# Altium PCB PCB.PcbDoc
Units mm, origin at the board's own origin, x right, y up, seen from the top; angles counter-clockwise.
Board outline 46.5 x 30 mm, 2 copper layers (Top Layer, Bottom Layer), stack 1.57 mm thick; 12 components, 5 nets, 25 pads, 36 vias.
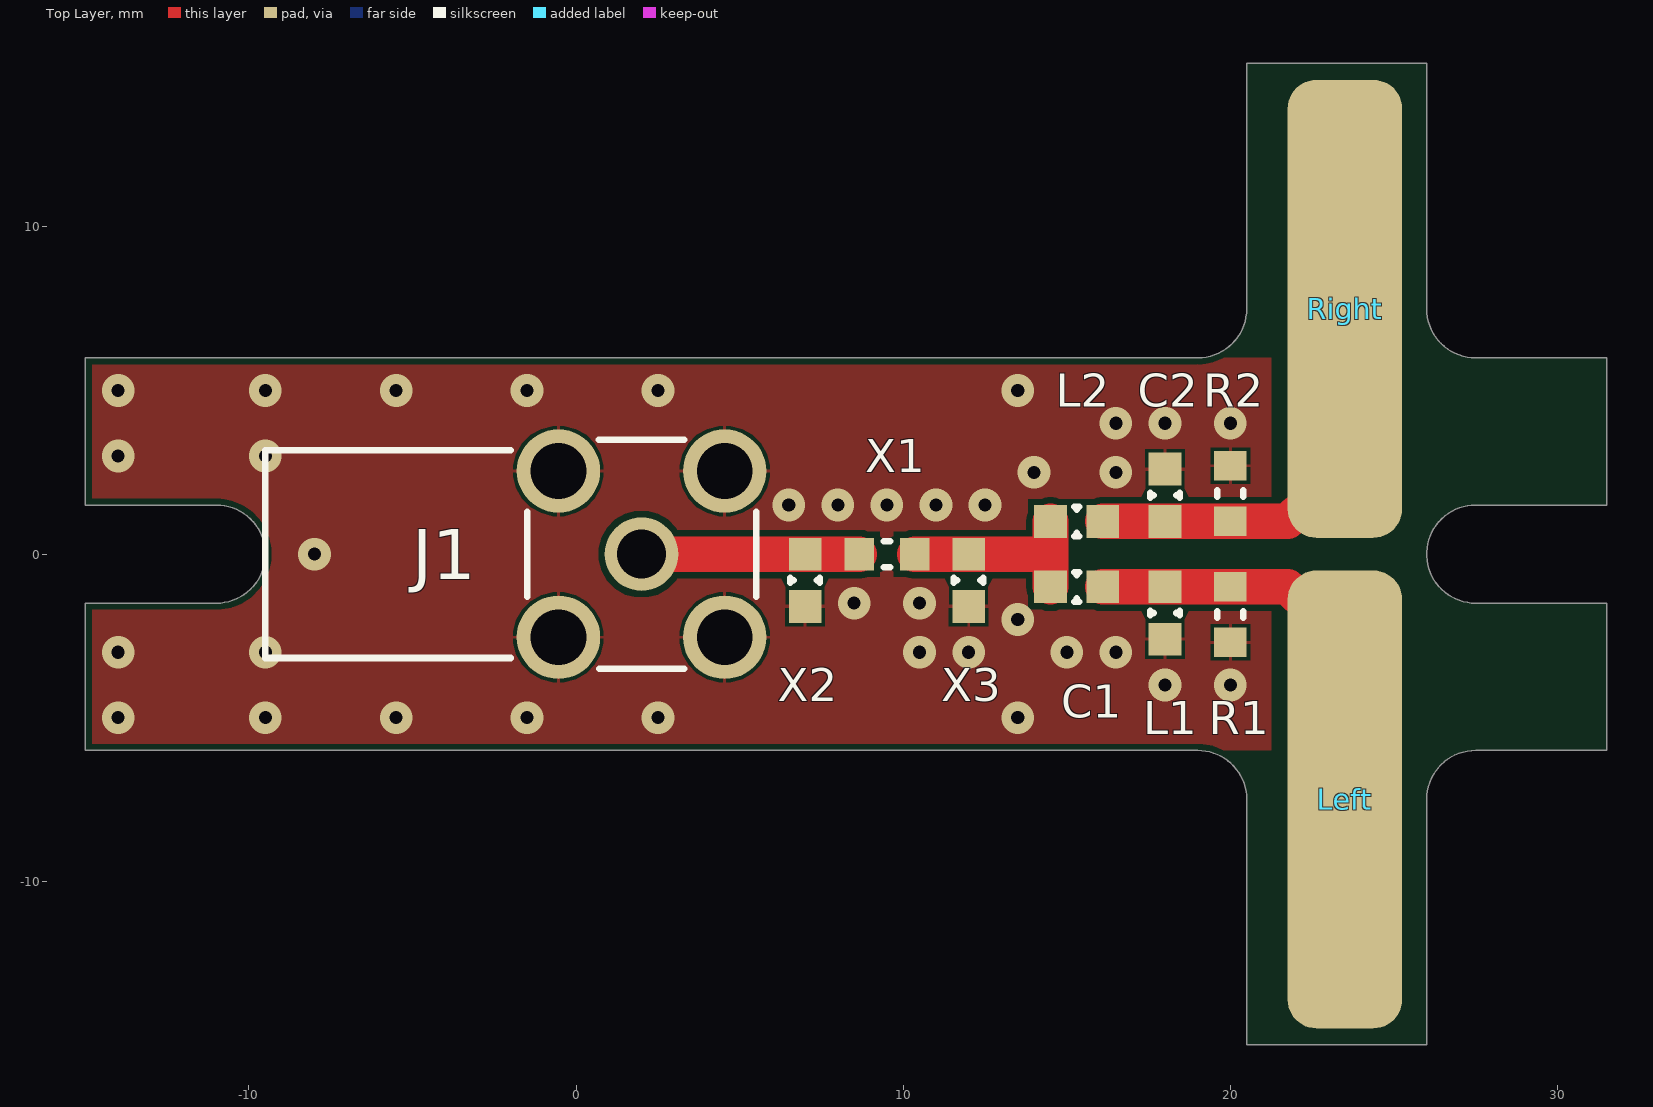
[diagram p0: Top Layer view]
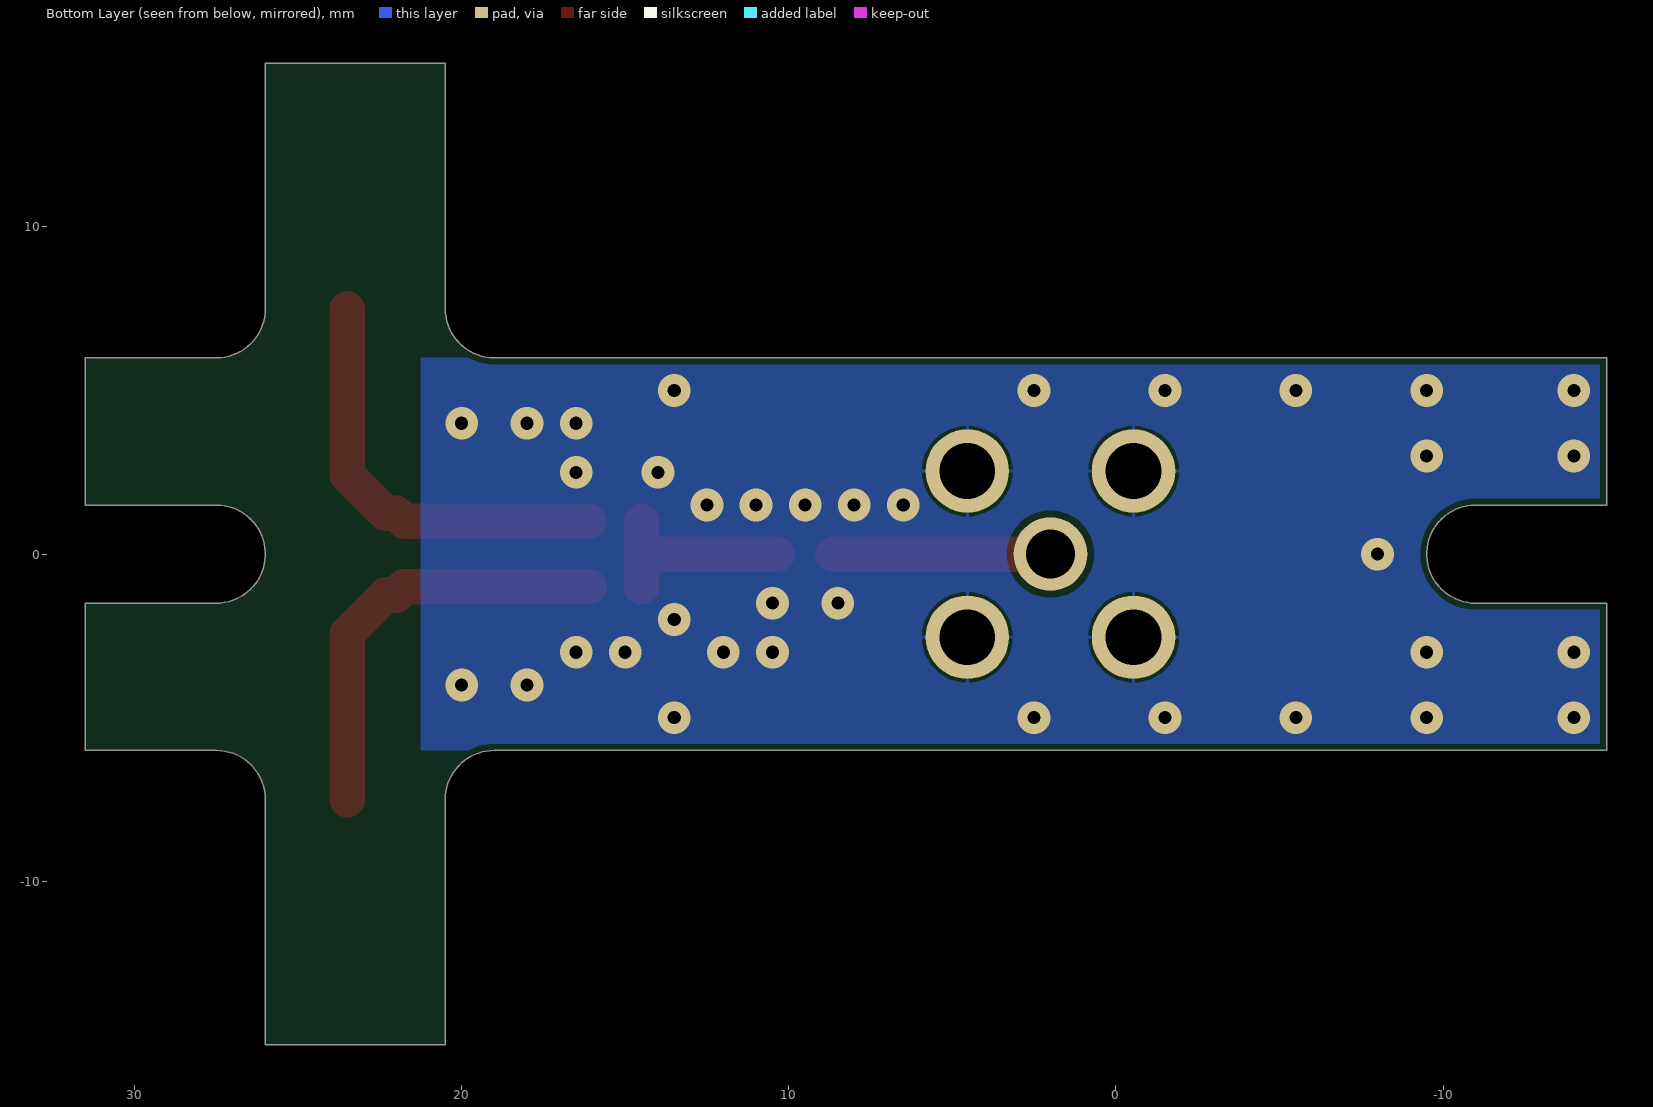
[diagram p1: Bottom Layer view, seen from below]
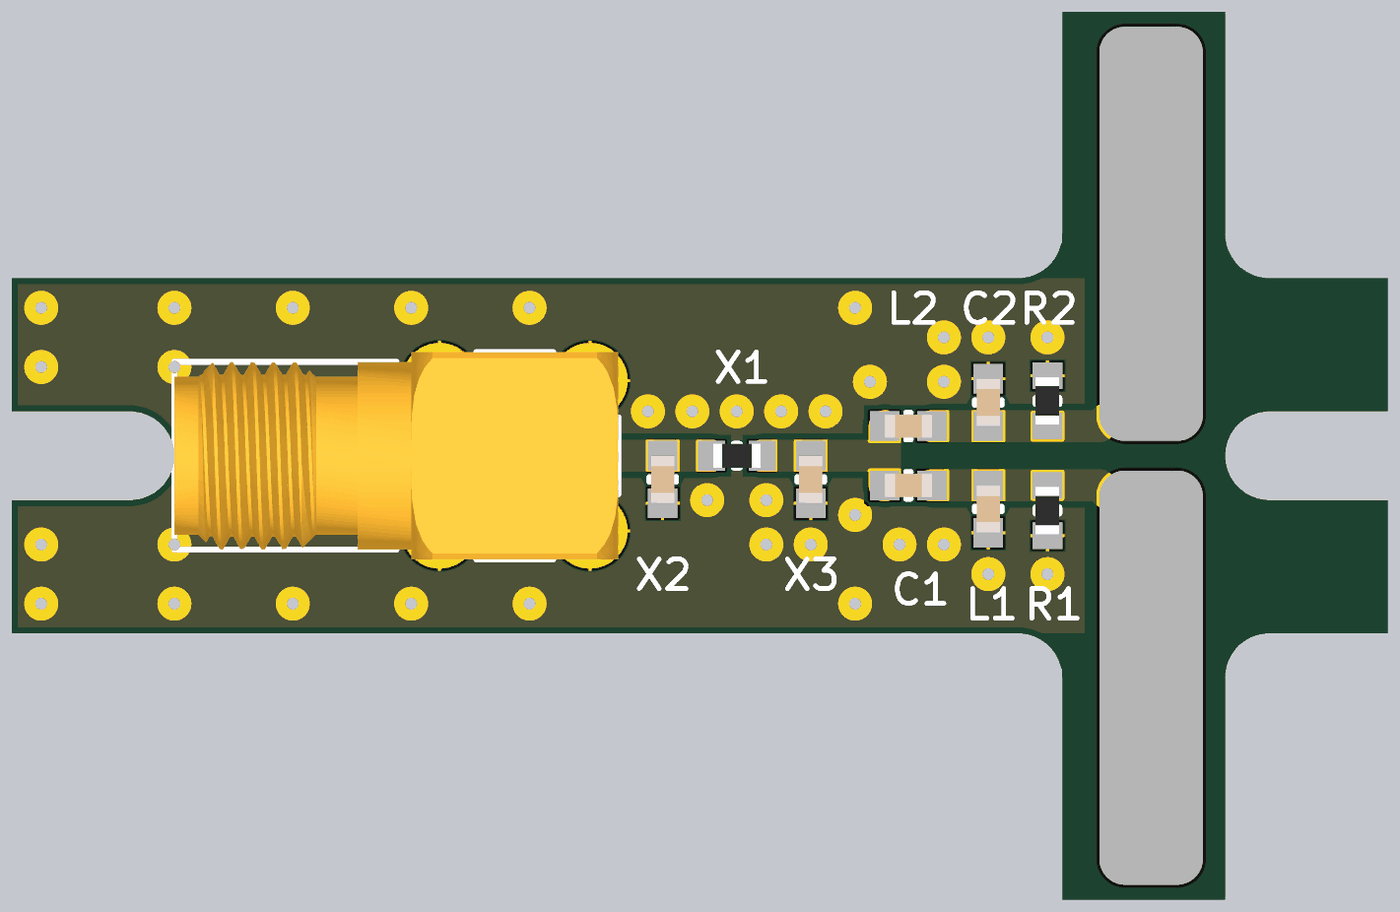
[diagram p2: 3D render of the assembled board from above, using the file's embedded part models]

## Layer stack, top to bottom
Top Solder: solder mask 0.0102, Solder Resist, Dk 3.5
Top Layer: signal copper 0.0356
Dielectric 1: core 1.4986, Core-043, Dk 4.3
Bottom Layer: signal copper 0.0356
Bottom Solder: solder mask 0.0102, Solder Resist, Dk 3.5

## Board outline
-15,-6 19,-6 cw(c19,-7.5) 20.5,-7.5 20.5,-15 26,-15 26,-7.5 cw(c27.5,-7.5) 27.5,-6 31.5,-6 31.5,-1.5 27.5,-1.5 cw(c27.5,0) 27.5,1.5 31.5,1.5 31.5,6 27.5,6 cw(c27.5,7.5) 26,7.5 26,15 20.5,15 20.5,7.5 cw(c19,7.5) 19,6 -15,6 -15,1.5 -11.5,1.5 -11,1.5 cw(c-11,0) -11,-1.5 -15,-1.5

## Design rules (kind name [scope] priority, off if disabled: settings)
BoardOutlineClearance [All] p1: gap=0.2 ignorepadtopadclearanceinfootprint=FALSE
Clearance "Schematic Clearance Constraint_2" [InNet('CPW_T')] p1: gap=0.2 ignorepadtopadclearanceinfootprint=FALSE
Clearance "Schematic Clearance Constraint_5" [InNet('CPW_IN')] p2: gap=0.2 ignorepadtopadclearanceinfootprint=FALSE
Clearance "Schematic Clearance Constraint_4" [InNet('CPW_OUT')] p3: gap=0.2 ignorepadtopadclearanceinfootprint=FALSE
Clearance "Schematic Clearance Constraint" [InNet('NetC8_2')] p4: gap=0.2 ignorepadtopadclearanceinfootprint=FALSE
Clearance [All] p5: gap=0.2 ignorepadtopadclearanceinfootprint=FALSE except(0.25: Arc-Hole Track-Hole SMDPad-Hole THPad-Hole Via-Hole Fill-Hole Poly-Hole Region-Hole Text-Hole)
ComponentClearance [All] p1: gap=0.102 collisioncheckmode=3 verticalgap=0.102 showdistances=TRUE
DiffPairsRouting [All] p1: maxlimit=0.102 minlimit=0.102 mostfreqgap=0.102 toplayer_minwidth=0.102 toplayer_maxwidth=1816.048 toplayer_prefwidth=0.102 bottomlayer_minwidth=0.102 bottomlayer_maxwidth=1816.048 bottomlayer_prefwidth=0.102 maxuncoupledlength=12.7
Height [All] p1: minheight=0 maxheight=1816.048 prefheight=12.7
HoleSize [All] p1: absolutevalues=TRUE maxlimit=6.3 minlimit=0.2 maxpercent=80.000 minpercent=20.000
HoleToHoleClearance [All] p1: gap=0.25 allowstackedmicrovias=FALSE
MinimumAnnularRing [All] p1: minimumring=0.076
MinimumSolderMaskSliver [All] p1: minsoldermaskwidth=0
PlaneClearance [All] p1: clearance=0.102
PlaneConnect PlaneConnectPowerPads [InPadClass('PowerPads')] p1: planeconnectstyle=Direct reliefexpansion=0.508 reliefentries=4 reliefconductorwidth=0.254 reliefairgap=0.254
PlaneConnect [All] p2: pad.planeconnectstyle=Relief pad.reliefexpansion=0.3 pad.reliefentries=4 pad.reliefconductorwidth=0.102 pad.reliefairgap=0.102 via.planeconnectstyle=Direct via.reliefexpansion=0.3 via.reliefentries=4 via.reliefconductorwidth=0.127 via.reliefairgap=0.127
PolygonConnect PolygonConnectPowerPads [All vs (InPadClass('PowerPads'))] p1: connectstyle=Direct reliefconductorwidth=0.254 reliefentries=4 polygonreliefangle="90 Angle" airgapwidth=0.254
PolygonConnect [All] p2: thpad.connectstyle=Relief thpad.reliefconductorwidth=0.102 thpad.reliefentries=4 thpad.polygonreliefangle="90 Angle" thpad.airgapwidth=0.102 smdpad.connectstyle=Relief smdpad.reliefconductorwidth=0.102 smdpad.reliefentries=4 smdpad.polygonreliefangle="90 Angle" smdpad.airgapwidth=0.102 via.connectstyle=Direct via.reliefconductorwidth=0.127 via.reliefentries=4 via.polygonreliefangle="90 Angle" via.airgapwidth=0.127
RoutingVias [All] p1: holewidth=0.2 width=0.45 viastyle="Through Hole" minholewidth=0.2 minwidth=0.45 maxholewidth=6.3 maxwidth=6.55
SilkToSilkClearance [All] p1: silktosilkclearance=0
SilkToSolderMaskClearance [IsPad] p1: minsilkscreentomaskgap=0.01 clearancetoexposedcopper=TRUE
SolderMaskExpansion [All] p1: expansion=0.075 istentingtop=FALSE
SupplyNets "Schematic Supply Nets_3" [InNet('GND')] p1: voltage=0.000
SupplyNets "Schematic Supply Nets_2" [InNet('VCC')] p2: voltage=0.000
SupplyNets "Schematic Supply Nets_1" [InNet('VEE')] p3: voltage=0.000
SupplyNets "Schematic Supply Nets" [InNet('VIN')] p4: voltage=0.000
Width [All] p1: maxlimit=1816.048 minlimit=0.102 preferedwidth=0.102
20 further rules are at their usual default settings.

## Components (designator, comment, footprint, x,y, rotation, side; value= is the part's Value field where it differs from the comment)
C1 "Cap" CAPC0603N 15.3,-1 r180 top value=2.7pF
C2 "Cap" CAPC0603N 18,1.8 r270 top value=2.7pF
J1 "60311002114501" 60311002114501 2,0 r270 top
L1 "Inductor" CAPC0603N 18,-1.8 r90 top value="12 nH"
L2 "Inductor" CAPC0603N 15.3,1 r180 top value="12 nH"
Left "TAB" TAB 23.5,-7.5 r90 top
R1 "Res" RESC0603N 20,-1.85 r90 top value=49R9
R2 "Res" RESC0603N 20,1.85 r270 top value=49R9
Right "TAB" TAB 23.5,7.5 r90 top
X1 "Res" RESC0603N 9.5,0 r0 top value=0R
X2 "Cap" CAPC0603N 7,-0.8 r90 top value=TBD
X3 "Cap" CAPC0603N 12,-0.8 r90 top value=TBD

## Footprints (in the part's own frame and the unit in brackets; to place one, negate y for a bottom-side part, rotate by r counter-clockwise, add the part's x,y. Pads: shape width x height; smd on the part's side, far side on the other; paste and mask are expansions set on the pad)
60311002114501 [mm] "SMA PCB THT Jack Right Angle"
  round 2.25 hole 1.5: 1(0,0)
  round 2.55 hole 1.7: 2(-2.54,2.54) 3(2.54,2.54) 4(2.54,-2.54) 5(-2.54,-2.54)
  silkscreen extent -3.5,-11.5 3.5,3.5, body extent -3.5,-11.5 3.5,3.5, height 9.66
CAPC0603N [mm] "Chip Capacitor, Body 1.6x0.8mm, IPC Medium Density"
  rect 1x1 smd: 1(-0.8,0) 2(0.8,0)
  silkscreen extent -0.08,-0.45 0.08,0.45, body extent -0.8,-0.4 0.8,0.4, height 0.82
RESC0603N [mm] "Chip Resistor, Body 1.6x0.8mm, IPC Medium Density"
  rect 0.9x1 smd: 1(-0.85,0) 2(0.85,0)
  silkscreen extent -0.1,-0.4 0.1,0.4, body extent -0.8,-0.4 0.8,0.4, height 0.45
TAB [mm]
  rrect50% 14x3.5 smd mask+0.102: 1(0,0)

## Part data
C1 C2: library part C16149, "Multilayer Ceramic Capacitors MLCC - SMD/SMT 2.7pF 50V 0603 RoHS", Manufacturer="Samsung Electro-Mechanics", MFR=CL10C2R7CB8NNNC, PACKAGE=0603, Temperature Coefficient=C0G, Voltage - Rated=50V, #LCSC=C16149, Basic/Extended=B, pf=2.7, Price=0.009$/unit
J1: library part CMP-03913-97004421-3, "Rf Coax Conn, Sma R/A Jack, 50 Ohm, Pcb Rohs Compliant: Yes", Insulation Resistance=5GΩ, Max Operating Temperature=165°C, Min Operating Temperature=-65°C, Connector Type=SMA, Impedance=50Ω, Insertion Loss (dB)=0.14dB, Insulation Material=PTFE, Orientation="Right Angle"
L1 L2: library part 744786112, MANUF=WE, DESCIPTION="INDUCTOR SMD RF 12 nH ±5% ±5% 600 mA 0603", DIGIKEY=TBD, FARNELL=TBD, MANUFCODE=744786112, NoPins=2, SCH="12 nH 0603 RF", SMD=YES, SUPPLY=SUB, TECH="Multilayer Ceramic SMT Inductor"
R1 R2: library part C23185, "Chip Resistor - Surface Mount 49.9Ohms ±1% 1/10W 0603 RoHS", MANUF="Uniroyal Elec", MANUFCODE=0603WAF499JT5E, PACKAGE='0603, #JLCPCB=C23185, B/E=B
X1: library part C21189, "Chip Resistor - Surface Mount 0Ohms ±1% 1/10W 0603 RoHS", MANUF="Uniroyal Elec", MANUFCODE=0603WAF0000T5E, PACKAGE='0603, #JLCPCB=C21189, B/E=B
X2 X3: library part C23969, "Multilayer Ceramic Capacitors MLCC - SMD/SMT 1pF 50V 0603 RoHS", Manufacturer="Samsung Electro-Mechanics", MFR=CL10C010CB8NNNC, PACKAGE=0603, Temperature Coefficient=C0G, Voltage - Rated=50V, #LCSC=C23969, Basic/Extended=B, pf=1, Price=0.007$/unit

## Via types
v1: diameter 1, hole 0.4, Top Layer to Bottom Layer, 36 vias

## Nets (pads, with @x,y where several pads share a name; then routed paths per layer and width w, separated by ;. In a path a pad name is that pad's centre, name@x,y a point inside that pad or via, vN(x,y) a via of type N, cw(c..) or ccw(c..) an arc to the next point about the centre after c; other vN are vias at no path point)
GND: C2.1 J1.2 J1.3 J1.4 J1.5 L1.1 R1.1 R2.1 X2.1 X3.1
  other v1: -14,-5 -9.5,-5 -5.5,-5 -1.5,-5 2.5,-5 13.5,-5 18,-4 20,-4 -14,-3 -9.5,-3 10.5,-3 12,-3 15,-3 16.5,-3 13.5,-2 8.5,-1.5 10.5,-1.5 -8,0 6.5,1.5 8,1.5 9.5,1.5 11,1.5 12.5,1.5 14,2.5 16.5,2.5 -14,3 -9.5,3 16.5,4 18,4 20,4 -14,5 -9.5,5 -5.5,5 -1.5,5 2.5,5 13.5,5
NetC1_1: C1.1 L1.2 Left.1 R1.2 | length 13.1
  Top Layer w1.09: C1.1 L1.2 R1.2 21.75,-1 21.999,-1.249 22.32,-1.249 23.5,-2.429 Left.1
NetC1_2: C1.2 L2.2 X1.2 X3.2 | length 6.2
  Top Layer w1.09: X1.2 X3.2 14.5,0 ; C1.2 L2.2
NetC2_2: C2.2 L2.1 R2.2 Right.1 | length 13.1
  Top Layer w1.09: L2.1 C2.2 R2.2 21.75,1 21.999,1.249 22.32,1.249 23.5,2.429 Right.1
NetJ1_1: J1.1 X1.1 X2.2 | length 6.6
  Top Layer w1.09: J1.1 X2.2 X1.1

## Polygon pours and split planes (outlines as drawn)
GND on Bottom Layer "GND_L02_P000" (solid, pour order 0): -15,-6 -15,6 21.25,6 21.25,-6
GND on Top Layer "GND_L01_P001" (solid, remove dead copper, pour order 1): -15,6 21.25,6 21.25,-6 -15,-6

## Silkscreen, mask and mechanical layers (free items; w line width, h text height)
Mechanical 1:
  lines w0.254: -15,-6 -15,-1.5 -11,-1.5 ccw(c-11,0) -11,1.5 -11.5,1.5 -15,1.5 -15,6 19,6 ccw(c19,7.5) 20.5,7.5 20.5,15 26,15 26,7.5 ccw(c27.5,7.5) 27.5,6 31.5,6 31.5,1.5 27.5,1.5 ccw(c27.5,0) 27.5,-1.5 28,-1.5 31.5,-1.5 31.5,-6 27.5,-6 ccw(c27.5,-7.5) 26,-7.5 26,-15 20.5,-15 20.5,-7.5 ccw(c19,-7.5) 19,-6 -15,-6